# EAGLE board 741_Waveform_Gen_RevA v4 (EAGLE 9.7.0)
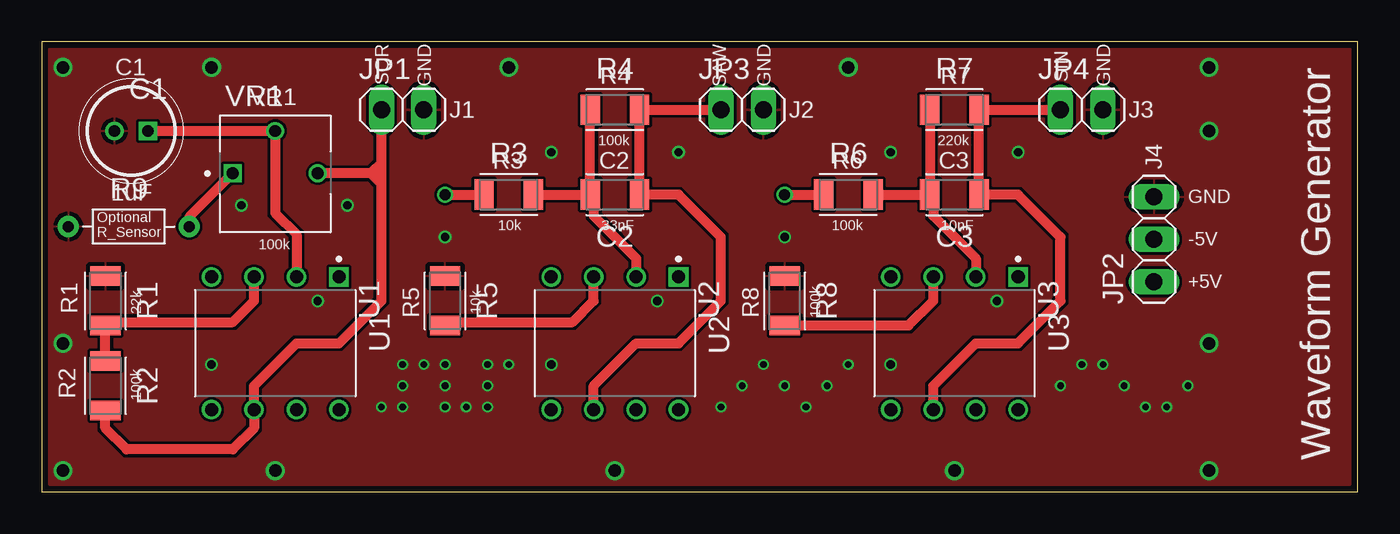
[diagram p0: board, top side]
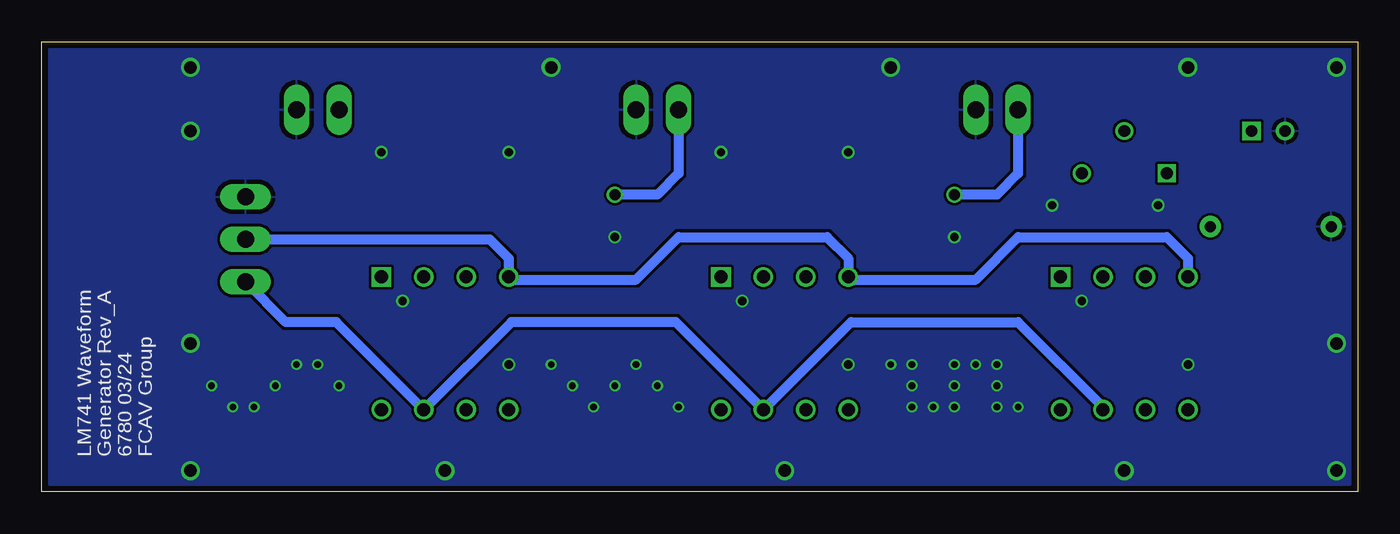
[diagram p1: board, bottom side, seen from below]

Size 78.74 x 26.92 mm. Coordinates in mm from the lower left corner, seen from the top.
Outline: 0,0 78.74,0 78.74,26.92 0,26.92 0,0
Copper layers (1*16): Top / Bottom
Stack-up Default Layer Stack: Top User Defined 0.035559375mm / Dielectric-1 User Defined 1.6mm / Bottom User Defined 0.035559375mm
Design rules: minimum copper width 6mil, minimum drill size 10mil, copper clearance wire_polygon to wire_polygon 6mil, copper clearance wire_polygon to pad_smd 6mil, copper clearance wire_polygon to via 6mil, copper clearance pad_smd to pad_smd 6mil, copper clearance pad_smd to via 6mil, copper clearance via to via 6mil, copper clearance smd to pad (same net) 6mil, copper clearance smd to via (same net) 6mil, copper clearance smd to smd (same net) 6mil, dimension clearance 15mil, restrict clearance 0mil, drill distance 6mil, keepout clearance 0mil

## Footprints (pad centres in the part's own frame; a part is rotated, then mirrored left to right if it is on the bottom)
CAPPRD200W50D525H1250 = drill 0.7 pad 1.1 square: 1 0,0 | drill 0.7 pad 1.1: 2 2,0
CAPC3216X135 = smd 1.165 x 1.815: 1 -1.475,0; 2 1.475,0
1X02 = drill 1.016 long: 1 -1.27,0; 2 1.27,0
1X03 = drill 1.016 long: 1 -2.54,0; 2 0,0; 3 2.54,0
RESC3216X70 = smd 1.165 x 1.815: 1 -1.475,0; 2 1.475,0
RESAD724W46L381D178B = drill 0.66 pad 1.26: 1 -3.62,0; 2 3.62,0
DIP794W45P254L959H508Q8 = drill 0.78 pad 1.13 square: 1 -3.97,3.81 | drill 0.78 pad 1.13: 2 -3.97,1.27; 3 -3.97,-1.27; 4 -3.97,-3.81; 5 3.97,-3.81; 6 3.97,-1.27; 7 3.97,1.27; 8 3.97,3.81
TRIM_3362P-1-253LF = drill 0.714 square: 1 -2.54,0 | drill 0.714: 2 0,2.54; 3 2.54,0

## Placement (x,y rotation side)
C1  1uF  [CAPPRD200W50D525H1250]  6.35,21.59 180 top
C2  33nF  [CAPC3216X135]  34.29,17.78 180 top
C3  10nF  [CAPC3216X135]  54.61,17.78 180 top
JP1  PINHD-1X2  [1X02]  21.59,22.86 0 top
JP2  PINHD-1X3  [1X03]  66.55,15.11 90 top
JP3  PINHD-1X2  [1X02]  41.91,22.86 0 top
JP4  PINHD-1X2  [1X02]  62.23,22.86 0 top
R1  22k  [RESC3216X70]  3.81,11.43 270 top
R2  100k  [RESC3216X70]  3.81,6.35 270 top
R3  10k  [RESC3216X70]  27.94,17.78 0 top
R4  100k  [RESC3216X70]  34.29,22.86 0 top
R5  10k  [RESC3216X70]  24.13,11.43 270 top
R6  100k  [RESC3216X70]  48.26,17.78 0 top
R7  220k  [RESC3216X70]  54.61,22.86 0 top
R8  100k  [RESC3216X70]  44.45,11.43 270 top
R9  0 Sense  [RESAD724W46L381D178B]  5.21,15.88 0 top
U1  LM741CN/NOPB  [DIP794W45P254L959H508Q8]  13.97,8.89 270 top
U2  LM741CN/NOPB  [DIP794W45P254L959H508Q8]  34.29,8.89 270 top
U3  LM741CN/NOPB  [DIP794W45P254L959H508Q8]  54.61,8.89 270 top
VR1  3362P-1-253LF  [TRIM_3362P-1-253LF]  13.97,19.05 0 top

## Library data of the parts
C1 = REA010M2CBK-0511P; DESCRIPTION: Aluminum Electrolytic Capacitors - Radial Leaded 160V 1.0uF 20% 5x11mm; HEIGHT: 12.5mm; MANUFACTURER_NAME: Lelon; MANUFACTURER_PART_NUMBER: REA010M2CBK-0511P; MOUSER_PART_NUMBER: 140-REA1R0M2CBK0511P; MOUSER_PRICE-STOCK: https://www.mouser.co.uk/ProductDetail/Lelon/REA010M2CBK-0511P?qs=tsfqLUzc7IoVZpITlkTcwQ%3D%3D
C2 C3 = Capacitor; CATEGORY: Capacitor
JP1 JP3 JP4 = Connector; CATEGORY: Headers; DESCRIPTION: Header, Straight, 2 Position; MANUFACTURER: Generic; MPN: Generic; OPERATING_TEMPERATURE: Generic; PART_STATUS: Active; PITCH: 0.100" (2.54mm); ROHS_COMPLIANCE: Generic; SERIES: Generic; SUB-CATEGORY: Headers, Male Pins; TYPE: Board to Board or Cable, Unshrouded, Through Hole, Straight
JP2 = Connector; CATEGORY: Headers; DESCRIPTION: Header, Straight, 3 Position; MANUFACTURER: Generic; MPN: Generic; OPERATING_TEMPERATURE: Generic; PART_STATUS: Active; PITCH: 0.100" (2.54mm); ROHS_COMPLIANCE: Generic; SERIES: Generic; SUB-CATEGORY: Headers, Male Pins; TYPE: Board to Board or Cable, Unshrouded, Through Hole, Straight
R1-R9 = Resistor; CATEGORY: Resistor; SUB-CATEGORY: Fixed
U1-U3 = LM741CN_NOPB; AVAILABILITY: In Stock; CHECK_PRICES: https://www.snapeda.com/parts/LM741CN/Texas+Instruments/view-part/?ref=eda; DESCRIPTION: Operational Amplifiers - Op Amps Operational Amplifier 8-PDIP 0 to 70; MF: Texas Instruments; MP: LM741CN; PACKAGE: DIP-8 NXP Semiconductors; PRICE: None; PURCHASE-URL: https://www.snapeda.com/api/url_track_click_mouser/?unipart_id=226044&manufacturer=Texas Instruments&part_name=LM741CN&search_term=lm741; SNAPEDA_LINK: https://www.snapeda.com/parts/LM741CN/Texas+Instruments/view-part/?ref=snap
VR1 = 3362P-1-253LF; AVAILABILITY: In Stock; CHECK_PRICES: https://www.snapeda.com/parts/3362P-1-253LF/Bourns/view-part/?ref=eda; DESCRIPTION: 1/4 Sq, Thru-Hole, TRIMMER, 25 Kilohms, Cermet, Single Turn | Bourns 3362P-1-253LF; MF: Bourns; MP: 3362P-1-253LF; PACKAGE: 3362P-1 Bourns Inc.; PRICE: None; PURCHASE-URL: https://www.snapeda.com/api/url_track_click_mouser/?unipart_id=493663&manufacturer=Bourns&part_name=3362P-1-253LF&search_term=None; SNAPEDA_LINK: https://www.snapeda.com/parts/3362P-1-253LF/Bourns/view-part/?ref=snap

## Nets
1IN+: R1.2 R2.1 U1.3
1IN-: C1.1 U1.2 VR1.2
1OUT: JP1.1 R2.2 R3.1 U1.6 VR1.3
2IN+: R5.2 U2.3
2IN-: C2.2 R3.2 R4.1 U2.2
2OUT: C2.1 JP3.1 R4.2 R6.1 U2.6
3IN+: R8.2 U3.3
3IN-: C3.2 R6.2 R7.1 U3.2
3OUT: C3.1 JP4.1 R7.2 U3.6
+5V: JP2.1 U1.7 U2.7 U3.7
-5V: JP2.2 U1.4 U2.4 U3.4
GND: C1.2 JP1.2 JP2.3 JP3.2 JP4.2 R1.1 R5.1 R8.1 R9.1
N$3: R9.2 VR1.1

## Tracks (layer width: path | path; a pad name or v marks a point on that pad's centre or on a via)
1IN+
  Top 0.61: R2.1 R1.2 4.01,10.16 11.43,10.16 12.7,11.43 U1.3
1IN-
  Top 0.61: C1.1 VR1.2 13.97,16.67 15.24,15.4 U1.2
1OUT  (via drill 0.65)
  Top 0.61: 20.32,18.41 20.32,11.43 17.78,8.89 15.24,8.89 12.7,6.35 U1.6 12.7,3.81 11.43,2.54 5.08,2.54 3.81,3.81 R2.2 | 20.32,18.41 19.68,19.05 | 19.68,19.05 VR1.3 | 20.32,18.41 20.32,19.68 | 20.32,19.68 JP1.1 | 20.32,19.68 19.68,19.05 | v24.13,17.78 R3.1
  Bottom 0.61: JP1.1 20.32,19.05 21.59,17.78 v24.13,17.78
2IN+
  Top 0.61: R5.2 24.34,10.16 31.75,10.16 33.02,11.43 U2.3
2IN-
  Top 0.61: R3.2 C2.2 | C2.2 33.02,17.57 33.02,16.51 35.56,13.97 U2.2 | C2.2 R4.1
2OUT  (via drill 0.65)
  Top 0.61: v44.45,17.78 R6.1 | U2.6 33.02,6.35 35.56,8.89 38.1,8.89 40.64,11.43 40.64,15.24 38.1,17.78 C2.1 R4.2 JP3.1
  Bottom 0.61: JP3.1 40.64,19.05 41.91,17.78 v44.45,17.78
3IN+
  Top 0.61: R8.2 51.87,9.96 53.34,11.43 U3.3
3IN-
  Top 0.61: R6.2 C3.2 | C3.2 53.34,17.57 53.34,16.51 55.88,13.97 U3.2 | R7.1 C3.2
3OUT
  Top 0.61: U3.6 53.34,6.35 55.88,8.89 58.42,8.89 60.96,11.43 60.96,15.24 58.42,17.78 C3.1 R7.2 JP4.1
+5V
  Bottom 0.61: U1.7 15.24,5.08 20.32,10.16 30.32,10.16 U2.7 40.8,10.16 50.64,10.16 U3.7 61.12,10.16 64.14,10.16 JP2.1
-5V
  Bottom 0.61: JP2.2 51.94,15.11 50.8,13.97 U3.4 50.64,12.7 43.18,12.7 40.64,15.24 31.75,15.24 30.48,13.97 U2.4 30.32,12.7 22.86,12.7 20.32,15.24 11.43,15.24 10.16,13.97 U1.4
GND  (via drill 0.4, 0.5, 0.75)
  other vias: 40.64,5.08 41.91,6.35 43.18,7.62 44.45,6.35 45.72,5.08 46.99,6.35 48.26,7.62 62.23,7.62 63.5,7.62 64.77,6.35 66.04,5.08 67.31,5.08 68.58,6.35 60.96,6.35 20.32,5.08 21.59,5.08 21.59,6.35 21.59,7.62 22.86,7.62 24.13,7.62 24.13,6.35 24.13,5.08 25.4,5.08 26.67,5.08 26.67,6.35 26.67,7.62 27.94,7.62 69.85,1.27 1.27,1.27 1.27,25.4 69.85,25.4 48.26,25.4 27.94,25.4 10.16,25.4 13.97,1.27 34.29,1.27 54.61,1.27 69.85,8.89 69.85,21.59 1.27,8.89 10.16,7.62 30.48,7.62 50.8,7.62 36.83,11.43 16.51,11.43 57.15,11.43 38.1,20.32 58.42,20.32 30.48,20.32 50.8,20.32 18.29,17.14 11.94,17.14 24.13,15.24 44.45,15.24
  pour Top: 0,26.92 78.74,26.92 78.74,0 0,0
  pour Bottom: 0,26.92 78.74,26.92 78.74,0 0,0
N$3
  Top 0.61: VR1.1 8.83,16.45 R9.2

## Text on the board
SilkscreenTop: SQR | GND | SAW | GND | GND | C1 | SIN | R7 | VR1 | R4 | J1 | J2 | J3 | 100k | 220k | R3 | C2 | R6 | C3 | J4 | 1uF | GND | Optional | 10k | 33nF | 100k | 10nF | R_Sensor | 100k | -5V | 22k | 10k | 100k | +5V | R1 | U1 | U2 | U3 | R5 | R8 | 100k | R2 | Waveform Generator
SilkscreenBottom: LM741 Waveform / Generator Rev_A / 6780 03/24 / FCAV Group
SolderMaskTop: square | triangle | sine